# EAGLE board PCB_RoleaTheodorIoan_333CA (EAGLE 9.7.0)
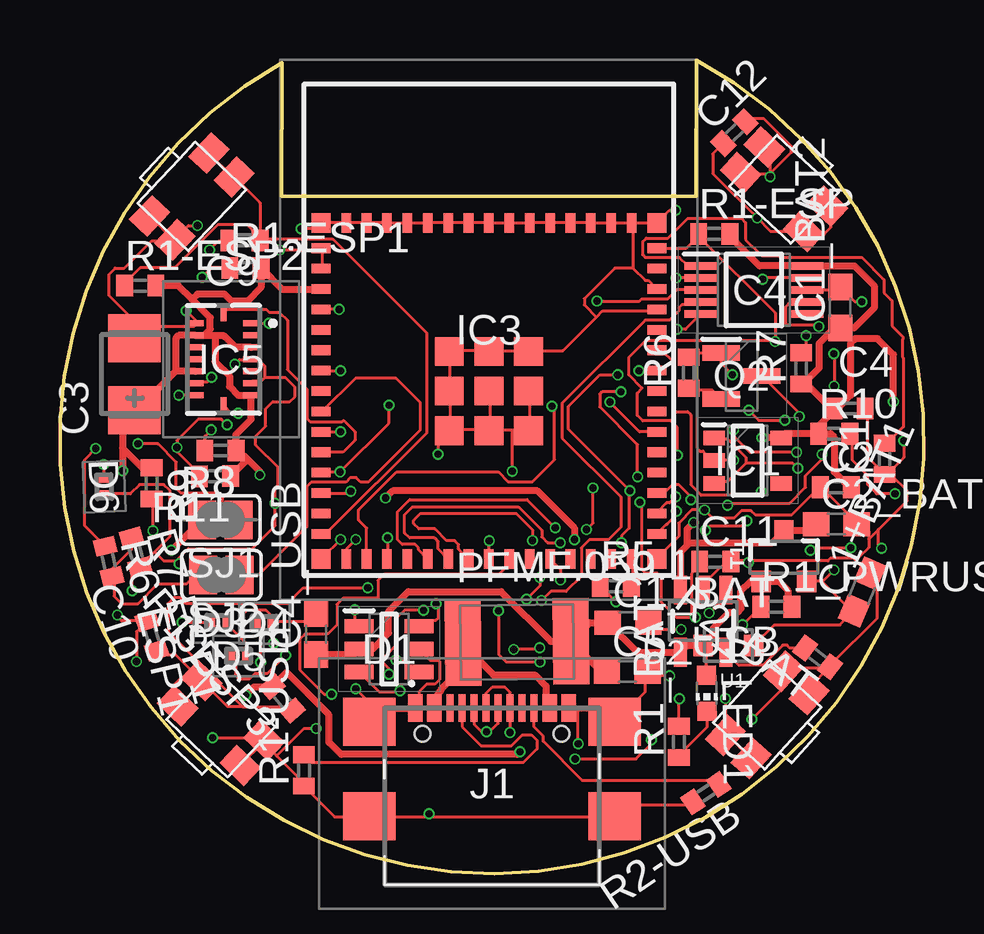
[diagram p0: board, top side]
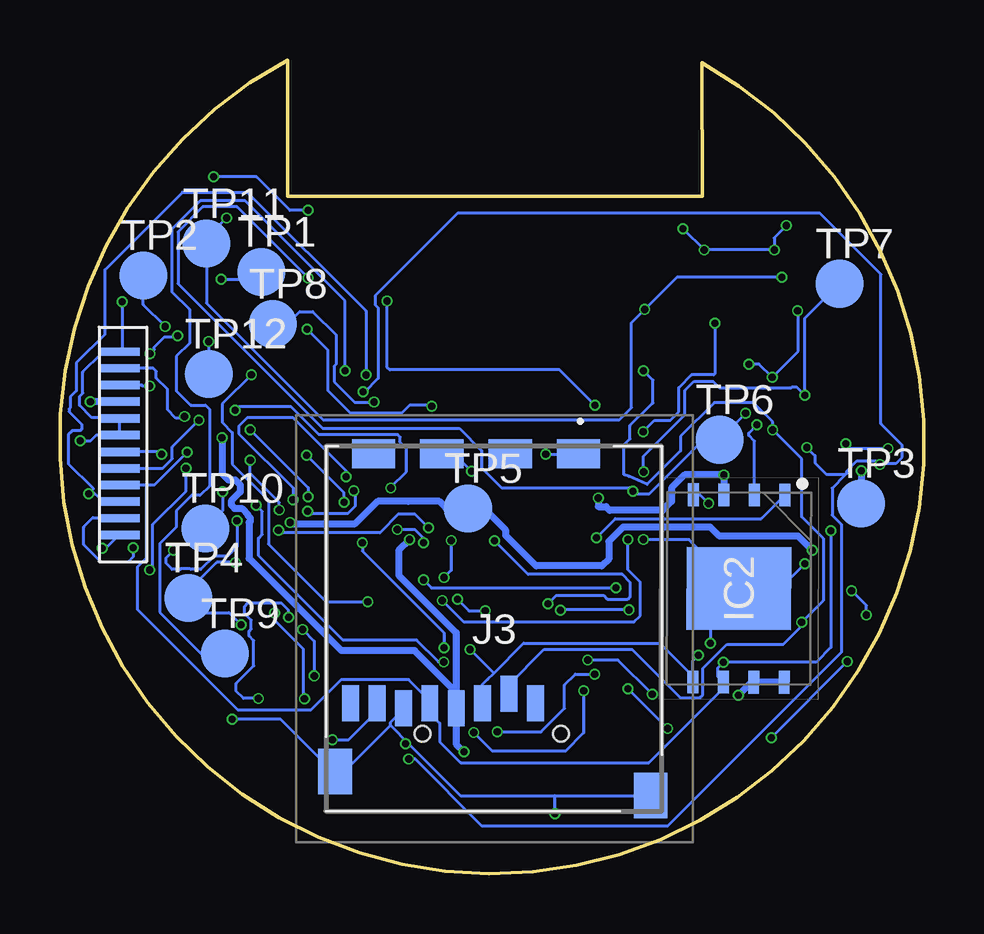
[diagram p1: board, bottom side, seen from below]

Size 36.01 x 33.9 mm. Coordinates in mm from the lower left corner, seen from the top.
Outline: 26.53,33.9 arc-303 9.26,33.79 9.24,28.22 26.51,28.22 26.53,33.9
Copper layers (1*16): Top / Bottom
Stack-up Default Layer Stack: Top User Defined 0.035mm / Dielectric-1 User Defined 1.6mm / Bottom User Defined 0.035mm
Design rules: minimum copper width 5mil, minimum drill size 0.3mm, copper clearance wire_polygon to wire_polygon 5mil, copper clearance wire_polygon to pad_smd 5mil, copper clearance wire_polygon to via 5mil, copper clearance pad_smd to pad_smd 5mil, copper clearance pad_smd to via 5mil, copper clearance via to via 5mil, copper clearance smd to pad (same net) 5mil, copper clearance smd to via (same net) 5mil, copper clearance smd to smd (same net) 5mil, dimension clearance 0.2mm, restrict clearance 0mil, via restrict clearance 0mil, drill distance 6mil, keepout clearance 0mil

## Footprints (pad centres in the part's own frame; a part is rotated, then mirrored left to right if it is on the bottom)
BUTTON = smd 1.4 x 1.05: P$1 -0.05,-0.725; P$2 -0.045,-2.175; P$3 3.55,-2.175; P$4 3.55,-0.725
EAGLE-LTSPICE_C0402 = smd 0.7 x 0.9: 1 -0.65,0; 2 0.65,0
RCL_C0603 = smd 1.1 x 1: 1 -0.85,0; 2 0.85,0
CT3528 = smd 2 x 2.2: + -1.5,0; - 1.5,0
SOT95P280X145-6N = smd 1.2 x 0.6: 1 -1.25,0.95; 2 -1.25,0; 3 -1.25,-0.95; 4 1.25,-0.95; 5 1.25,0; 6 1.25,0.95
AVX---SD0805S020S1R0_AVX_SD0805S020S1R0_0 = smd 0.8 x 0.9: 1 -1.05,0; 2 1.05,0
PESD5V0S1BL315 = smd 0.4 x 0.7: 1 -0.35,0; 2 0.35,0
SOT95P280X120-5N = smd 0.9 x 0.6: 1 -1.4,0.95; 2 -1.4,0; 3 -1.4,-0.95; 4 1.4,-0.95; 5 1.4,0.95
SON127P800X600X80-9N = smd 0.95 x 0.45: 1 -3.9,1.905; 2 -3.9,0.635; 3 -3.9,-0.635; 4 -3.9,-1.905; 5 3.9,-1.905; 6 3.9,-0.635; 7 3.9,0.635; 8 3.9,1.905 | smd 3.45 x 4.35: 9 0,0
ESP32S3MINI1N8 = smd 0.8 x 0.4: 1 -7,5.95; 2 -7,5.1; 3 -7,4.25; 4 -7,3.4; 5 -7,2.55; 6 -7,1.7; 7 -7,0.85; 8 -7,0; 9 -7,-0.85; 10 -7,-1.7; 11 -7,-2.55; 12 -7,-3.4; 13 -7,-4.25; 14 -7,-5.1; 15 -7,-5.95; 31 7,-5.95; 32 7,-5.1; 33 7,-4.25; 34 7,-3.4; 35 7,-2.55; 36 7,-1.7; 37 7,-0.85; 38 7,0; 39 7,0.85; 40 7,1.7; 41 7,2.55; 42 7,3.4; 43 7,4.25; 44 7,5.1; 45 7,5.95 | smd 0.4 x 0.8: 16 -5.95,-7; 17 -5.1,-7; 18 -4.25,-7; 19 -3.4,-7; 20 -2.55,-7; 21 -1.7,-7; 22 -0.85,-7; 23 0,-7; 24 0.85,-7; 25 1.7,-7; 26 2.55,-7; 27 3.4,-7; 28 4.25,-7; 29 5.1,-7; 30 5.95,-7; 46 5.95,7; 47 5.1,7; 48 4.25,7; 49 3.4,7; 50 2.55,7; 51 1.7,7; 52 0.85,7; 53 0,7; 54 -0.85,7; 55 -1.7,7; 56 -2.55,7; 57 -3.4,7; 58 -4.25,7; 59 -5.1,7; 60 -5.95,7 | smd 1.2 x 1.2: 61 0,0; 66 -1.65,1.65; 67 -1.65,0; 68 -1.65,-1.65; 69 0,-1.65; 70 1.65,-1.65; 71 1.65,0; 72 1.65,1.65; 73 0,1.65 | smd 0.8 x 0.8: 62 -7,7; 63 -7,-7; 64 7,-7; 65 7,7
SOP50P490X110-10N = smd 1.4 x 0.3: 1 -2.2,1; 2 -2.2,0.5; 3 -2.2,0; 4 -2.2,-0.5; 5 -2.2,-1; 6 2.2,-1; 7 2.2,-0.5; 8 2.2,0; 9 2.2,0.5; 10 2.2,1
BMI085 = smd 0.675 x 0.25: 1 1.165,1.5; 2 1.165,1; 3 1.165,0.5; 4 1.165,0; 5 1.165,-0.5; 6 1.165,-1; 7 1.165,-1.5; 9 -1.165,-1.5; 10 -1.165,-1; 11 -1.165,-0.5; 12 -1.165,0; 13 -1.165,0.5; 14 -1.165,1; 15 -1.165,1.5 | smd 0.25 x 0.675: 8 0,-1.915; 16 0,1.915
USB4110GFA = smd 0.3 x 1.15: A1 -3.35,3.678; A4 -2.55,3.678; A5 -1.25,3.678; A6 -0.25,3.678; A7 0.25,3.678; A8 1.25,3.678; A9 2.55,3.678; A12 3.35,3.678; B1 3.05,3.678; B4 2.25,3.678; B5 1.75,3.678; B6 0.75,3.678; B7 -0.75,3.678; B8 -1.75,3.678; B9 -2.25,3.678; B12 -3.05,3.678 | smd 2.18 x 2: MP1 -5.11,-0.827; MP2 5.11,-0.827; MP3 -5.11,3.103; MP4 5.11,3.103 | hole 0.65: -2.89,2.603; 2.89,2.603
112ATAARR03ATTEND = smd 1.8 x 1.2: G1 10.6,10.4; G2 4.9,10.4; S1 7.75,10.4; S2 2.05,10.4 | smd 1.4 x 1.9: G3 13.6,-3.85; G4 0.45,-2.85 | smd 0.7 x 1.5: P1 8.8,0; P2 7.7,0.4; P3 6.6,0; P4 5.5,-0.2; P5 4.4,0; P6 3.3,-0.2; P7 2.2,0; P8 1.1,0
ADAFRUIT_CHIP-LED0603 = smd 0.8 x 0.8: A 0,-0.75; C 0,0.75
VARISTOR_CT/CN1812 = smd 1.5 x 3.6: 1 -2.25,0; 2 2.25,0
SOT96P240X120-3N = smd 1.55 x 0.65: 1 -0.85,0.96; 2 -0.85,-0.96; 3 0.85,0
EAGLE-LTSPICE_R0402 = smd 0.7 x 0.9: 1 -0.65,0; 2 0.65,0
SJ = smd 1.168 x 1.6: 1 -0.762,0; 2 0.762,0
SPARKFUN-DISCRETESEMI_SOT23-3 = smd 0.8 x 0.9: 1 -0.95,-1; 2 0.95,-1; 3 0,1.1
TP20R = smd 2 x 2: TP 0,0
SPARKFUN-IC-POWER_SOT23-5 = smd 0.55 x 1.2: 1 -0.95,-1.3; 2 0,-1.3; 3 0.95,-1.3; 4 0.95,1.3; 5 -0.95,1.3
LCD_CONNECTOR = smd 0.35 x 1.7: 1 1.85,0.84; 2 2.54,0.84; 3 3.24,0.84; 4 3.93,0.84; 5 4.63,0.84; 6 5.32,0.84; 7 6.02,0.84; 8 6.71,0.84; 9 7.4,0.84; 10 8.09,0.84; 11 8.79,0.84; 12 9.48,0.84

## Placement (x,y rotation side)
BOOT_BUTTON  BUTTON  [BUTTON]  29.89,30.77 316.9 top
BUTTON1  BUTTON  [BUTTON]  3.24,27.94 46.7 top
BUTTON2  BUTTON  [BUTTON]  6.98,4.02 136.5 top
C1  1uF  [EAGLE-LTSPICE_C0402]  34.37,17.28 90 top
C1+BAT1  4.7uF  [RCL_C0603]  33.44,11.74 66.8 top
C1_BAT  4.7uF  [RCL_C0603]  23.68,10.46 0 top
C1_BAT2  4.7uF  [RCL_C0603]  32.53,23.59 90 top
C2  1uF  [EAGLE-LTSPICE_C0402]  32.34,16.1 0 top
C2_BAT  4.7uF  [RCL_C0603]  32.36,14.56 0 top
C3  100uF  [CT3528]  3.1,20.81 90 top
C4  100nF  [EAGLE-LTSPICE_C0402]  32.91,19.38 0 top
C4_USB  100nF  [RCL_C0603]  10.68,9.98 90 top
C5_USB  4.7nF  [RCL_C0603]  23.65,8.41 0 top
C9  100nF  [EAGLE-LTSPICE_C0402]  7.69,26.39 180 top
C10  100nF  [EAGLE-LTSPICE_C0402]  3.83,9.91 107.9 top
C11  1uF  [EAGLE-LTSPICE_C0402]  27.31,13 0 top
C12  100nF  [EAGLE-LTSPICE_C0402]  28.11,30.88 44.4 top
D1  USBLC6-2SC6Y  [SOT95P280X145-6N]  13.72,9.36 0 top
D2  AVX---SD0805S020S1R0_AVX_SD0805S020S1R0AVX_SD0805S020S1R0_0_0  [AVX---SD0805S020S1R0_AVX_SD0805S020S1R0_0]  27.86,9.51 180 top
D3  PESD3V3S1BLYL  [PESD5V0S1BL315]  6.62,10.47 0 top
D4  PESD3V3S1BLYL  [PESD5V0S1BL315]  8.51,10.43 0 top
D5  PESD3V3S1BLYL  [PESD5V0S1BL315]  7.44,9.07 0 top
D6  PESD3V3S1BLYL  [PESD5V0S1BL315]  1.84,16.13 272.2 top
IC1  XC6220A331MR-G  [SOT95P280X120-5N]  28.66,17.21 0 top
IC2  W25Q256JVEIQ  [SON127P800X600X80-9N]  7.71,11.88 269.8 bottom
IC3  ESP32-S3-MINI-1-N8  [ESP32S3MINI1N8]  17.88,20.11 0 top
IC4  DRV2605LDGST  [SOP50P490X110-10N]  28.92,24.32 0 top
IC5  BMI085  [BMI085]  6.81,21.43 0 top
J1  USB4110-GF-A  [USB4110GFA]  18.01,3.22 0 top
J3  112A-TAAR-R03_ATTEND  [112ATAARR03ATTEND]  24.99,7.1 0 bottom
LED1  [ADAFRUIT_CHIP-LED0603]  26.96,7.52 180.9 top
PFMF.050.1  500mA  [VARISTOR_CT/CN1812]  19.05,9.65 0.7 top
Q2  2N7002  [SOT96P240X120-3N]  28.41,20.74 0 top
R1-ESP  10K  [EAGLE-LTSPICE_R0402]  27.27,26.66 0 top
R1-ESP1  10K  [EAGLE-LTSPICE_R0402]  7.73,25.24 0 top
R1-ESP2  10K  [EAGLE-LTSPICE_R0402]  3.35,24.5 0 top
R1-ESP3  10K  [EAGLE-LTSPICE_R0402]  9.27,7.29 130.8 top
R1-USB  5K1  [EAGLE-LTSPICE_R0402]  10.17,4.3 90 top
R1_BAT  200  [EAGLE-LTSPICE_R0402]  25.8,5.49 90 top
R1_PWRUSB  100K  [EAGLE-LTSPICE_R0402]  29.86,11.12 0 top
R2-USB  5K1  [EAGLE-LTSPICE_R0402]  26.92,3.36 214.1 top
R2_BAT  2K  [EAGLE-LTSPICE_R0402]  31.58,9.01 143.2 top
R5  10K  [EAGLE-LTSPICE_R0402]  23.17,11.98 0 top
R6  10K  [EAGLE-LTSPICE_R0402]  26.21,20.87 90 top
R6-ESP1  100K  [EAGLE-LTSPICE_R0402]  2.03,13.01 283.3 top
R7  22  [EAGLE-LTSPICE_R0402]  30.89,21.05 90 top
R7-ESP1  100K  [EAGLE-LTSPICE_R0402]  3.15,13.39 285.8 top
R8  10K  [EAGLE-LTSPICE_R0402]  6.69,17.63 180 top
R9  10K  [EAGLE-LTSPICE_R0402]  3.82,16.26 270 top
R10  10K  [EAGLE-LTSPICE_R0402]  32.27,18.33 0 top
R11  10K  [EAGLE-LTSPICE_R0402]  6.46,16.56 180.3 top
RESSET_BUTTON  BUTTON  [BUTTON]  31.73,6.94 227.8 top
SJ1  [SJ]  6.68,14.74 180 top
SJ2  [SJ]  6.73,12.45 180 top
T1  20V/4.2A/52mΩ/1.4W  [SPARKFUN-DISCRETESEMI_SOT23-3]  30.18,13.18 0 top
TP1  TPTP20R  [TP20R]  27.62,25.06 0 bottom
TP2  TPTP20R  [TP20R]  32.54,24.93 0 bottom
TP3  TPTP20R  [TP20R]  2.61,15.43 0 bottom
TP4  TPTP20R  [TP20R]  30.65,11.49 0 bottom
TP5  TPTP20R  [TP20R]  19,15.22 0 bottom
TP6  TPTP20R  [TP20R]  8.52,18.08 0 bottom
TP7  TPTP20R  [TP20R]  3.52,24.58 0 bottom
TP8  TPTP20R  [TP20R]  27.14,22.9 0 bottom
TP9  TPTP20R  [TP20R]  29.14,9.17 0 bottom
TP10  TPTP20R  [TP20R]  29.96,14.39 0 bottom
TP11  TPTP20R  [TP20R]  29.9,26.25 0 bottom
TP12  TPTP20R  [TP20R]  29.81,20.82 0 bottom
U1  SPARKFUN-IC-POWER_MCP73831  [SPARKFUN-IC-POWER_SOT23-5]  26.81,10.52 180 top
U$1  LCD  [LCD_CONNECTOR]  34.38,23.6 270 bottom

## Library data of the parts
BOOT_BUTTON BUTTON1 BUTTON2 LED1 PFMF.050.1 RESSET_BUTTON SJ1 SJ2 TP1-TP12 U$1 = Hector_Watch
C1 C2 C4 C9-C12 = Hector_Watch; SPICEMODEL: NONE; SPICEPREFIX: C
C1+BAT1 C1_BAT C1_BAT2 C2_BAT C3 C4_USB C5_USB = Hector_Watch; SPICEPREFIX: C
D1 = Hector_Watch; ARROW_PART_NUMBER: USBLC6-2SC6Y; ARROW_PRICE-STOCK: https://www.arrow.com/en/products/usblc6-2sc6y/stmicroelectronics?region=nac; DESCRIPTION: Low Cap. ESD Protection Auto SOT-23-6 STMicroelectronics USBLC6-2SC6Y, Dual Uni-Directional TVS Diode Array, 6-Pin SOT-23; HEIGHT: 1.45mm; MANUFACTURER_NAME: STMicroelectronics; MANUFACTURER_PART_NUMBER: USBLC6-2SC6Y; MOUSER_PART_NUMBER: 511-USBLC6-2SC6Y; MOUSER_PRICE-STOCK: https://www.mouser.co.uk/ProductDetail/STMicroelectronics/USBLC6-2SC6Y?qs=gNDSiZmRJS%2FOgDexvXkdow%3D%3D
D2 = Hector_Watch; CENTROID_NOT_SPECIFIED: No; DATASHEET: http://datasheets.avx.com/schottky.pdf; DIGIKEY_DESCRIPTION: DIODE SCHOTTKY 20V 1A 0805; DIGIKEY_PART_NUMBER: 478-7800-1-ND; LEAD_FREE: yes; MF: AVX; MOUSER_PART_NUMBER: 581-SD0805S020S1R0; MPN: SD0805S020S1R0; PACKAGE: 0805 (2012 metric); PREFIX: D; ROHS: yes; TEMPERATURE_RANGE_HIGH: +125°C; TEMPERATURE_RANGE_LOW: -55°C
D3-D6 = Hector_Watch; ARROW_PART_NUMBER: PESD3V3S1BLYL; ARROW_PRICE-STOCK: https://www.arrow.com/en/products/pesd3v3s1blyl/nexperia?region=nac; DESCRIPTION: PESD3V3S1BL - Low capacitance bidirectional ESD protection diode; HEIGHT: 0mm; MANUFACTURER_NAME: Nexperia; MANUFACTURER_PART_NUMBER: PESD3V3S1BLYL; MOUSER_PART_NUMBER: 771-PESD3V3S1BLYL; MOUSER_PRICE-STOCK: https://www.mouser.co.uk/ProductDetail/Nexperia/PESD3V3S1BLYL?qs=vLWxofP3U2zWoKHYJMVoKQ%3D%3D
IC1 = Hector_Watch; DESCRIPTION: LDO Voltage Regulators; HEIGHT: 1.2mm; MANUFACTURER_NAME: Torex; MANUFACTURER_PART_NUMBER: XC6220A331MR-G; MOUSER_PART_NUMBER: 865-XC6220A331MR-G; MOUSER_PRICE-STOCK: https://www.mouser.co.uk/ProductDetail/Torex-Semiconductor/XC6220A331MR-G?qs=AsjdqWjXhJ8ZSWznL1J0gg%3D%3D
IC2 = Hector_Watch; ARROW_PART_NUMBER: W25Q256JVEIQ; ARROW_PRICE-STOCK: https://www.arrow.com/en/products/w25q256jveiq/winbond-electronics?region=nac; DESCRIPTION: 256M-bit Serial Flash Memory with uniform 4KB sectors and Dual/Quad SPI; HEIGHT: 0.8mm; MANUFACTURER_NAME: Winbond; MANUFACTURER_PART_NUMBER: W25Q256JVEIQ; MOUSER_PART_NUMBER: 454-W25Q256JVEIQ; MOUSER_PRICE-STOCK: https://www.mouser.co.uk/ProductDetail/Winbond/W25Q256JVEIQ?qs=qSfuJ%252Bfl%2Fd4o%2FNFUf7yCgA%3D%3D
IC3 = Hector_Watch; DESCRIPTION: WiFi Development Tools - 802.11 [Engineering Samples] SMD Module, ESP32-S3FN8, 8 MB SPI Flash, PCB Antenna; HEIGHT: 2.55mm; MANUFACTURER_NAME: Espressif Systems; MANUFACTURER_PART_NUMBER: ESP32-S3-MINI-1-N8; MOUSER_PART_NUMBER: 356-ESP32-S3-MINI1N8; MOUSER_PRICE-STOCK: https://www.mouser.co.uk/ProductDetail/Espressif-Systems/ESP32-S3-MINI-1-N8?qs=XAiT9M5g4x82rl6F%2FIYUQg%3D%3D
IC4 = Hector_Watch; ARROW_PART_NUMBER: DRV2605LDGST; ARROW_PRICE-STOCK: https://www.arrow.com/en/products/drv2605ldgst/texas-instruments?region=nac; DESCRIPTION: ERM & LRA Device Haptic Driver 2-5V BGA9 Texas Instruments DRV2605LDGST Piezo Haptic Motor Driver IC, 5 V, 10-Pin VSSOP; HEIGHT: 1.1mm; MANUFACTURER_NAME: Texas Instruments; MANUFACTURER_PART_NUMBER: DRV2605LDGST; MOUSER_PART_NUMBER: 595-DRV2605LDGST; MOUSER_PRICE-STOCK: https://www.mouser.co.uk/ProductDetail/Texas-Instruments/DRV2605LDGST?qs=asCBFxFfL1TjvcNdZsR2BA%3D%3D
IC5 = Hector_Watch; ARROW_PART_NUMBER: BMI085; ARROW_PRICE-STOCK: https://www.arrow.com/en/products/bmi085/bosch; DESCRIPTION: IMUs - Inertial Measurement Units High-performance IMU BMI085 for virtual and augmented reality applications; HEIGHT: 1mm; MANUFACTURER_NAME: BOSCH; MANUFACTURER_PART_NUMBER: BMI085; MOUSER_PART_NUMBER: 262-BMI085; MOUSER_PRICE-STOCK: https://www.mouser.co.uk/ProductDetail/Bosch-Sensortec/BMI085?qs=y6ZabgHbY%252ByGCM8LfWZyqA%3D%3D
J1 = Hector_Watch; DESCRIPTION: CONN USB 2.0 TYPE-C R/A SMT; HEIGHT: 3.26mm; MANUFACTURER_NAME: GCT (GLOBAL CONNECTOR TECHNOLOGY); MANUFACTURER_PART_NUMBER: USB4110-GF-A; MOUSER_PART_NUMBER: 640-USB4110-GF-A; MOUSER_PRICE-STOCK: https://www.mouser.co.uk/ProductDetail/GCT/USB4110-GF-A?qs=KUoIvG%2F9IlYiZvIXQjyJeA%3D%3D
J3 = Hector_Watch; DESCRIPTION: Micro SD Card Socket, Push-Push Type, Top Mount, SMT, H=1.83mm, 10u; HEIGHT: 1.9mm; MANUFACTURER_NAME: ATTEND; MANUFACTURER_PART_NUMBER: 112A-TAAR-R03 ATTEND
Q2 = Hector_Watch; ARROW_PART_NUMBER: 2N7002; ARROW_PRICE-STOCK: https://www.arrow.com/en/products/2n7002/on-semiconductor?region=europe; DESCRIPTION: N-channel MOSFET,2N7002 0.115A 60V; HEIGHT: 1.2mm; MANUFACTURER_NAME: onsemi; MANUFACTURER_PART_NUMBER: 2N7002; MOUSER_PART_NUMBER: 512-2N7002; MOUSER_PRICE-STOCK: https://www.mouser.co.uk/ProductDetail/onsemi-Fairchild/2N7002?qs=0dwsXDNhqlz66WJJhrTFjQ%3D%3D
R1-ESP R1-ESP1-R1-ESP3 R1-USB R1_BAT R1_PWRUSB R2-USB R2_BAT R5 R6 R6-ESP1 R7 R7-ESP1 R8-R11 = Hector_Watch; SPICEMODEL: NONE; SPICEPREFIX: R
T1 = Hector_Watch; PROD_ID: TRANS-14715
U1 = Hector_Watch; PROD_ID: IC-09995

## Nets
3V3: C1_BAT2.1 C2.2 C3.+ C4.1 IC1.5 IC2.3 IC2.7 IC2.8 IC3.3 IC4.10 IC5.3 IC5.7 IC5.11 IC5.14 J3.P4 R1-ESP1.2 R1-ESP2.2 R1-ESP3.2 R1-ESP.2 R7.1 R8.1 R9.1 R10.1 R11.1 TP3.TP U$1.4
ADC_BAT: IC3.9 SJ2.1
BOOT: BOOT_BUTTON.P$3 BOOT_BUTTON.P$4 C12.1 IC3.4 R1-ESP1.1 TP11.TP
BUTTON1: BUTTON1.P$3 BUTTON1.P$4 C9.1 IC3.15 R1-ESP2.1
BUTTON2: BUTTON2.P$3 BUTTON2.P$4 C10.1 IC3.26 R1-ESP3.1
D+: D1.4 IC3.24
D-: D1.6 IC3.23
DISP_RST: IC3.20 U$1.11
DN: D1.1 J1.A7 J1.B7
DP: D1.3 J1.A6 J1.B6
EN_DRV: IC3.17 IC4.5
GND: BOOT_BUTTON.P$1 BOOT_BUTTON.P$2 BUTTON1.P$1 BUTTON1.P$2 BUTTON2.P$1 BUTTON2.P$2 C1+BAT1.2 C1.1 C1_BAT2.2 C1_BAT.2 C2.1 C2_BAT.2 C3.- C4.2 C4_USB.2 C5_USB.2 C9.2 C10.2 C11.2 C12.2 D1.5 D3.2 D4.2 D5.2 D6.2 IC1.2 IC2.4 IC2.9 IC3.1 IC3.2 IC3.42 IC3.43 IC3.46 IC3.47 IC3.48 IC3.49 IC3.50 IC3.51 IC3.52 IC3.53 IC3.54 IC3.55 IC3.56 IC3.57 IC3.58 IC3.59 IC3.60 IC3.61 IC3.62 IC3.63 IC3.64 IC3.65 IC3.66 IC3.67 IC3.68 IC3.69 IC3.70 IC3.71 IC3.72 IC3.73 IC4.8 IC5.4 IC5.6 IC5.10 IC5.15 J1.A1 J1.A12 J1.B1 J1.B12 J1.MP1 J1.MP2 J1.MP3 J1.MP4 J3.G1 J3.G2 J3.G3 J3.G4 J3.P6 Q2.2 R1-USB.1 R1_PWRUSB.1 R2-USB.2 R2_BAT.1 R6.1 R7-ESP1.2 RESSET_BUTTON.P$1 RESSET_BUTTON.P$2 TP4.TP U1.2 U$1.1 U$1.5 U$1.6 U$1.12
IMU_INT1: IC3.11 IC5.16
IMU_INT2: IC3.10 IC5.1
IN_DRV: IC3.16 IC4.4
LEDA: R7.2 U$1.3
LEDK: Q2.3 U$1.2
MISO: D6.1 IC2.2 IC3.33 J3.P7 R11.2
MOSI: D5.1 IC2.5 IC3.31 J3.P3 R10.2 U$1.10
N$1: J1.B5 R2-USB.1
N$2: R6-ESP1.1 SJ1.1
N$3: C1+BAT1.1 D2.1 IC1.1 IC1.3 T1.2
N$4: C1.2 IC4.1
N$7: Q2.1 R5.1 R6.2
N$8: R6-ESP1.2 R7-ESP1.1 SJ2.2
N$10: R1_BAT.2 U1.1
N$12: R2_BAT.2 U1.5
N$13: J1.A5 R1-USB.2
N$16: LED1.C R1_BAT.1
PIN_LED: IC3.30 R5.2
PPG_INT: IC3.36 TP8.TP
RESET: C11.1 IC3.45 R1-ESP.1 RESSET_BUTTON.P$3 RESSET_BUTTON.P$4 TP12.TP
RX: IC3.40 TP10.TP
SCK: D4.1 IC2.6 IC3.32 J3.P5 R9.2 U$1.9
SCL: IC3.13 IC4.2 IC5.8 TP6.TP
SDA: IC3.12 IC4.3 IC5.9 TP7.TP
SS_FLASH: IC2.1 IC3.18
SS_SD: D3.1 IC3.7 J3.P2 R8.2
SS_TFT: IC3.21 U$1.8
TFT_DC: IC3.22 U$1.7
TX: IC3.39 TP9.TP
VBAT: C2_BAT.1 SJ1.2 T1.3 TP5.TP U1.3
VBUS: C1_BAT.1 C4_USB.1 C5_USB.1 D1.2 D2.2 LED1.A PFMF.050.1.2 R1_PWRUSB.2 T1.1 U1.4
VIBE_OUT+: IC4.9 TP1.TP
VIBE_OUT-: IC4.7 TP2.TP
VUSB: J1.A4 J1.A9 J1.B4 J1.B9 PFMF.050.1.1

## Tracks (layer width: path | path; a pad name or v marks a point on that pad's centre or on a via)
3V3  (via drill 0.3)
  Top 0.3: v19.17,5.08 19.06,4.97 11.72,4.97 11.22,5.47 11.22,6.61 9.45,8.38 R1-ESP3.2 8.08,7.78 v7.73,7.43 | IC5.14 6,22.43 6.26,22.69 6.26,23.17 5.51,23.92 | 5.51,23.92 4.93,24.5 R1-ESP2.2 | IC5.14 4.96,22.43 4.82,22.3 4.82,20.93 | IC5.11 4.82,20.93 | 4.82,20.93 3.2,19.31 C3.+ 2.61,18.82 2.61,17.73 | R10.1 32.12,18.33 32.27,18.18 32.27,16.74 32.91,16.1 C2.2 | v29.26,18.16 IC1.5 30.23,18.33 R10.1 | C4.1 32.15,19.38 31.13,20.4 R7.1 30.97,20.4 31.64,21.06 31.64,22.09 32.29,22.74 C1_BAT2.1 33.11,22.74 33.94,23.57 33.94,24.5 33.12,25.32 IC4.10 29.16,25.32 27.92,26.56 R1-ESP.2 | v34.75,19.67 34.75,21.63 34.08,22.3 33.15,22.3 32.95,22.1 32.95,19.93 32.4,19.38 C4.1 | 2.61,17.73 v2.61,16.78 | IC5.3 7.31,21.93 6.87,22.37 6.81,22.43 6.4,22.43 | v8.33,16.61 8.33,16.75 7.83,17.25 | 7.83,17.25 7.45,17.63 R8.1 7.34,18.3 7.98,18.94 IC5.7 7.43,19.93 7.06,20.3 7.06,20.74 6.46,21.34 6.46,22.37 6.4,22.43 | IC5.14 6.4,22.43 | C4.1 32.26,19.28 31.62,18.64 R10.1 | 2.61,17.73 3.43,16.91 R9.1 | IC3.3 9.26,24.36 R1-ESP1.2 8.38,24.43 7.81,23.86 7.15,23.86 6.86,24.15 5.73,24.15 5.51,23.92 | R11.1 7.8,17.25 7.83,17.25 | v21.44,13.92 21.44,14.41 19.9,15.95 13.87,15.95 v13.57,15.65
  Bottom 0.3: v19.17,5.08 19.49,5.4 J3.P4 19.49,7.56 | v2.61,16.78 TP3.TP | v29.26,18.16 29.26,16.67 29,16.41 28.71,16.41 28.5,16.2 28.5,15.9 28.88,15.53 28.88,15.37 28.73,15.22 28.43,15.22 28.17,14.96 28.17,14.92 28.08,14.83 28.08,14.68 28.13,14.63 28.13,13.14 24.28,9.29 21.22,9.29 19.49,7.56 | U$1.4 v34.75,19.67 | IC2.8 IC2.7 7.18,7.98 v7.73,7.43 | 19.49,7.56 19.49,10.04 21.89,12.44 21.89,13.47 v21.44,13.92 | IC2.3 v8.33,16.61 9.98,16.61 10.52,16.07 10.52,15.51 10.89,15.14 13.1,15.14 13.25,15.29 13.57,15.29 v13.57,15.65
ADC_BAT
  Top 0.127: IC3.9 10.93,19.26 12.31,20.64 14.01,20.64 15,19.65 15,18.47 12.85,16.32 12.54,16.32 12.35,16.5 12.1,16.5 11.92,16.32 10.47,16.32 10.28,16.13 10.28,14.45 8.28,12.45 SJ2.1
BOOT  (via drill 0.3)
  Top 0.127: v11.64,23.51 IC3.4 | R1-ESP1.1 6.31,25.24 v5.92,24.85 | BOOT_BUTTON.P$3 31.09,26.66 31.87,26.66 32.14,26.93 32.14,27.66 BOOT_BUTTON.P$4 | BOOT_BUTTON.P$3 | BOOT_BUTTON.P$4 | C12.1 27.22,29.99 27.22,29.16 v29.06,27.32 29.63,26.76 BOOT_BUTTON.P$3
  Bottom 0.127: v5.92,24.85 10.3,24.85 v11.64,23.51 12.18,22.96 12.18,19.42 12.68,18.92 25.05,18.92 29.9,23.77 TP11.TP 29.9,26.48 v29.06,27.32
BUTTON1
  Top 0.127: BUTTON1.P$4 7.2,29.03 BUTTON1.P$3 8.34,27.95 C9.1 | BUTTON1.P$4 | C9.1 8.34,26.49 7.8,27.03 6.56,27.03 4.78,25.25 3.35,25.25 2.7,24.6 R1-ESP2.1 | C9.1 8.4,26.45 11.36,26.45 15.27,22.54 15.27,18.35 11.08,14.16 IC3.15
BUTTON2  (via drill 0.3)
  Top 0.127: BUTTON2.P$3 4.85,9.1 4.23,9.1 C10.1 | 7.61,6.96 6.99,6.96 BUTTON2.P$3 | R1-ESP3.1 9.54,6.96 7.61,6.96 | 7.61,6.96 4.5,10.07 4.5,11.25 4.74,11.49 5.01,11.49 5.25,11.25 9.49,11.25 10.14,11.91 v12.83,11.91 | BUTTON2.P$3 5.8,8.14 5.04,8.14 4.76,7.87 4.76,7.14 BUTTON2.P$4 | BUTTON2.P$4 | IC3.26 20.86,12.68 v20.86,12.24
  Bottom 0.127: v20.86,12.24 20.53,11.91 v12.83,11.91
D+  (via drill 0.3)
  Top 0.127: IC3.24 18.73,12.91 18.3,12.48 13.51,12.48 13.25,12.22 13.25,11.47 11.8,11.47 11.54,11.22 11.54,10.37 11.15,9.98 10.21,9.98 9.99,9.76 9.99,8.5 11.01,7.48 v11.32,7.48 | D1.4 14.75,8.41 14.25,8.9 v14.01,8.9
  Bottom 0.127: v11.32,7.48 12.74,8.9 v14.01,8.9
D-  (via drill 0.3)
  Top 0.127: D1.6 15.21,10.55 15.67,10.55 15.77,10.65 15.77,11.15 v15.67,11.25 | IC3.23 v17.88,13.86 v17.89,13.87
  Bottom 0.127: v15.67,11.25 15.32,11.6 13.34,11.6 13.18,11.44 12.34,11.44 12.23,11.55 12.23,12.13 12.57,12.47 16.49,12.47 v17.89,13.87
DISP_RST  (via drill 0.3)
  Top 0.127: v20.64,14.41 19.47,15.58 14.57,15.58 14.07,15.08 14.07,13.91 14.26,13.72 14.79,13.72 14.94,13.57 14.94,13.5 IC3.20 | v28.64,14.71 28.41,14.48 27.07,14.48 v26.91,14.31 | v31.28,13.47 31.39,13.58 v32.96,13.58
  Bottom 0.127: U$1.11 33.52,14.83 34.64,14.83 35.02,14.45 35.02,13.71 34.31,13.01 33.15,13.01 32.96,13.19 v32.96,13.58 | v20.64,14.41 21.22,14.99 21.89,14.99 22.68,14.2 26.8,14.2 v26.91,14.31 | v28.64,14.71 28.64,13.62 29.03,13.23 29.59,13.23 30.15,12.68 30.56,12.68 30.59,12.71 30.97,12.71 31,12.68 31.34,12.68 31.6,12.94 31.6,13.16 v31.28,13.47
DN  (via drill 0.3)
  Top 0.127: J1.B7 17.26,6.22 17.57,5.91 v17.78,5.91 17.91,5.91 18.26,6.26 J1.A7 | D1.1 12.29,10.48 v12.29,10.99 | v13.72,8.31 13.72,8.53 13.46,8.79 13.46,8.97 14.06,9.57 14.06,10.67 14.37,10.98 v15.15,10.98
  Bottom 0.127: v17.78,5.91 15.95,5.91 14.97,6.89 14.97,7.87 14.53,8.31 v13.72,8.31 | v12.29,10.99 v15.14,10.99 v15.15,10.98
DP  (via drill 0.3)
  Top 0.127: D1.3 13.31,7.57 14.12,7.57 v14.18,7.63 | v18.76,5.88 J1.B6 18.76,7.55 18.55,7.76 18.01,7.76 17.76,7.51 J1.A6
  Bottom 0.127: v14.18,7.63 14.18,5.86 14.92,5.12 18,5.12 v18.76,5.88
EN_DRV  (via drill 0.3)
  Top 0.127: IC3.17 12.78,14.4 12.45,14.73 12.45,15.16 14.03,16.74 18.27,16.74 18.68,16.33 19.7,16.33 20.62,17.25 20.62,19.36 v20.51,19.47 | IC4.5 26.08,22.68 v25.71,22.68
  Bottom 0.127: v25.71,22.68 24.85,21.82 24.85,20.14 23.92,19.21 21.74,19.21 21.42,19.53 20.57,19.53 v20.51,19.47
GND  (via drill 0.3)
  Top 0.127: v28.46,10.37 29.1,11 R1_PWRUSB.1 | 26.56,20.15 27.19,20.15 27.44,19.89 Q2.2 | 26.56,20.15 26.3,20.15 R6.1 26.56,20.15 | 26.56,20.15 26.56,17.73 26.68,17.61 26.81,17.61 27.19,17.22 IC1.2 27.32,17.22 v28.08,17.22 | C4.2 33.67,19.26 33.67,17.35 34.3,16.72 C1.1 34.43,16.59 | R2_BAT.1 32.02,8.59 30.37,8.59 30.24,8.46 RESSET_BUTTON.P$2 30.11,8.33 30.11,7.7 v28.84,6.43 | IC3.64 24.9,13.16 25.79,14.05 25.79,14.61 26.34,15.15 v26.87,15.15 27.21,14.81 28.1,14.81 28.41,15.13 28.81,15.13 29,14.94 30.49,14.94 31.64,16.08 C2.1 31.76,16.08 33.16,14.68 C2_BAT.2 33.42,14.56 33.71,14.27 33.71,13.94 | 28.7,13.03 32.02,13.03 32.14,13.16 33.06,13.16 33.07,13.15 | 28.7,13.03 28.08,13.03 C11.2 27.78,13 26.81,12.08 U1.2 | 33.07,13.15 33.27,13.15 33.71,13.59 33.71,13.94 | R2_BAT.1 32.14,8.72 34.05,10.62 34.05,12.14 33.79,12.4 C1+BAT1.2 33.7,12.52 33.07,13.15 | 34.43,16.59 34.68,16.59 35.32,15.95 35.32,15.54 34.11,14.34 | 34.11,14.34 33.71,13.94 | 28.7,13.03 v28.7,12.97 | 21.68,6.81 22.49,6.81 22.92,6.38 J1.MP4 23.15,6.33 24.4,7.57 24.4,8.33 C5_USB.2 24.67,8.24 v25.41,8.24 | 21.68,6.81 21.6,6.81 v21.6,5.41 | 21.68,6.81 J1.A12 J1.B1 | R2-USB.2 26.3,2.87 23.63,2.87 23.16,2.4 J1.MP2 22.99,2.37 15.38,2.37 | 13.35,6.68 13.1,6.44 J1.MP3 13.32,6.71 | 13.35,6.68 13.47,6.81 14.53,6.81 J1.A1 14.67,6.89 14.87,6.81 14.74,6.81 14.94,6.88 J1.B12 14.96,7.58 15.28,7.9 15.63,7.9 15.82,8.09 15.82,8.84 15.76,8.9 15.43,8.9 D1.5 | 9.03,4.91 8.39,5.54 BUTTON2.P$2 | 9.03,4.91 10.17,3.76 R1-USB.1 10.17,3.64 11.44,2.37 12.84,2.37 J1.MP1 12.97,2.37 15.38,2.37 | v12.33,7.7 13.32,6.71 | 13.32,6.71 13.35,6.68
  Top 0.127: v10.68,6.05 10.17,6.05 9.03,4.91 | 15.38,2.37 v15.38,2.49 | D4.2 8.9,10.49 10.43,10.49 10.68,10.75 C4_USB.2 | v11.7,13.92 10.93,13.16 IC3.63 | v8.9,9.6 8.9,10.37 D4.2 | 8.52,20.65 8.39,20.53 8.01,20.53 IC5.6 | 8.52,20.65 8.52,21.16 8.27,21.42 8.01,21.42 | 8.01,21.42 IC5.4 | 3.95,13.41 3.31,12.78 R7-ESP1.2 3.01,12.45 v3.01,11.79 | 3.95,13.41 4.58,14.05 4.58,15.95 4.33,16.21 3.31,16.21 2.93,15.83 1.92,15.83 D6.2 | 8.52,20.65 9.41,20.65 9.79,20.27 9.79,19.88 9.58,19.67 8.87,19.67 8.58,19.38 8.58,18.65 8.16,18.23 8.16,17.86 9.09,16.93 9.09,16.2 8.97,16.08 v8.97,15.43 8.97,14.5 8.01,13.54 5.35,13.54 4.84,13.03 | 4.84,13.03 4.33,13.03 3.95,13.41 | 4.84,13.03 v4.97,12.91 | IC3.2 10.93,25.23 10.93,25.99 IC3.1 10.81,25.99 v9.16,25.99 | v6.24,25.99 6.62,26.37 7,26.37 C9.2 | v5.73,27 5.35,27 4.84,26.5 BUTTON1.P$2 | 3.44,22.69 3.19,22.43 C3.- 3.44,22.69 | 3.44,22.69 3.57,22.81 5.6,22.81 IC5.15 5.65,23.06 v5.26,23.45 | C10.2 3.57,10.62 3.19,10.62 C10.2 | 3.44,22.69 2.04,24.08 2.04,24.97 2.3,25.23 2.68,25.23 3.82,26.37 4.71,26.37 BUTTON1.P$2 | 22.36,23.19 20.97,21.8 19.57,21.8 IC3.72 19.44,21.8 17.92,21.8 IC3.73 17.79,21.8 16.27,21.8 IC3.66 16.27,21.67 16.27,20.15 IC3.67 16.27,20.02 16.27,18.49 | 22.36,23.19 22.62,23.45 24.78,23.45 IC3.42 | IC3.70 19.57,18.49 19.57,20.02 IC3.71 | 17.92,18.49 17.92,20.02 IC3.61 | 16.27,18.49 17.79,18.49 IC3.69 17.92,18.49 | 16.27,18.49 IC3.68 16.14,18.37 15.76,17.99 v15.76,17.48 | 17.92,18.49 18.85,18.49 | 18.85,18.49 19.06,18.49 | 19.06,18.49 19.44,18.49 IC3.70 | 29.6,29.16 30.49,30.05 30.49,30.31 29.35,31.45 28.59,31.45 C12.2 | 29.6,29.16 28.46,29.16 BOOT_BUTTON.P$2
  Top 0.127: IC3.46 23.76,27.13 23,27.13 IC3.47 22.87,27.13 22.24,27.13 IC3.48 22.11,27.13 21.35,27.13 IC3.49 21.22,27.13 20.46,27.13 IC3.50 20.33,27.13 19.7,27.13 IC3.51 19.57,27.13 18.81,27.13 IC3.52 18.68,27.13 17.92,27.13 IC3.53 17.79,27.13 17.16,27.13 IC3.54 17.03,27.13 16.27,27.13 IC3.55 16.14,27.13 15.38,27.13 IC3.56 15.25,27.13 14.49,27.13 IC3.57 14.36,27.13 13.73,27.13 IC3.58 13.6,27.13 12.84,27.13 IC3.59 12.71,27.13 11.95,27.13 IC3.60 11.82,27.13 10.93,27.13 IC3.62 10.81,27 10.68,26.88 v10.05,26.88 | 23.89,25.23 24.4,24.72 24.52,24.72 24.78,24.46 IC3.43 | 23.89,25.23 23.89,27 IC3.46 | IC3.46 23.89,27.13 24.78,27.13 IC3.65 24.9,27.13 25.41,27.64 v25.67,27.64 | 22.36,23.19 21.86,23.7 21.86,23.96 23.13,25.23 23.89,25.23 | 18.85,18.49 v18.85,16.77 | 19.06,18.49 IC3.70 | v6.36,5.67 8.39,5.67 BUTTON2.P$2 | IC4.8 31.13,24.34 32.53,24.34 C1_BAT2.2 33.14,23.83 v33.42,23.83 | 7.53,9.84 7,10.37 D3.2 | 7.53,9.84 7.76,9.6 7.76,9.1 D5.2 | C10.2 2.56,10.53 2.39,10.7 v2.39,10.78 | C10.2 3.19,10.08 v3.19,8.84 | 7.53,9.84 7.53,10.69 7.83,10.99 8.58,10.99 8.86,10.71 D4.2 | C1_BAT.2 24.82,10.17 v25.89,10.17 | IC5.10 5.72,20.5 6.16,20.5 6.32,20.66 v6.32,20.68 | v7.29,21.23 7.48,21.42 8.01,21.42 | v35.17,18.04 35.17,17.33 34.43,16.59 | 29.6,29.16 v29.6,29.04 29.6,30.03 BOOT_BUTTON.P$1 | BUTTON2.P$2 8.51,5.51 BUTTON2.P$1 | BUTTON1.P$1 4.73,26.42 BUTTON1.P$2 | R2_BAT.1 31.23,7.75 RESSET_BUTTON.P$1 | v34.25,13.56 34.11,13.7 34.11,14.34
  Bottom 0.127: v28.46,10.37 28.97,10.87 30.63,10.87 31.1,11.34 30.82,11.62 | v28.08,17.22 28.08,16.68 26.87,15.47 v26.87,15.15 | 30.82,11.62 29.47,12.97 v28.7,12.97 | 22.24,6.18 22.24,6.3 21.75,6.79 J3.P6 | 22.24,6.18 24.14,4.27 24.53,4.27 J3.G4 24.68,4.3 26.81,6.43 v28.84,6.43 | 15.38,3.25 19.32,3.25 21.48,5.41 | 15.38,3.25 J3.G3 | 22.24,6.18 21.48,5.41 | 21.48,5.41 v21.6,5.41 | v10.68,6.05 v12.33,7.7 | v15.38,2.49 15.38,3.25 | v18.85,16.77 19.54,17.46 J3.G2 | v11.7,13.92 9.79,13.92 7.76,11.89 IC2.9 | v8.9,9.6 8.9,10.62 7.76,11.76 IC2.9 | v4.97,12.91 5.98,11.89 7.63,11.89 IC2.9 | IC2.4 9.33,15.79 v8.97,15.43 | v5.73,27 6.24,26.5 v6.24,25.99 v9.16,25.99 v10.05,26.88 | v15.76,17.48 14.49,17.48 14.47,17.5 J3.G1 | v29.6,29.04 27.83,29.04 26.43,27.64 v25.67,27.64 | v3.19,8.84 v6.36,5.67 | 30.82,11.62 TP4.TP | v2.39,10.78 2.39,11.18 v3,11.79 v3.01,11.79 | v33.42,23.83 33.42,21.87 U$1.1 33.67,21.67 34.3,21.67 35.06,20.91 35.06,20.02 35.19,19.89 35.19,19.51 34.68,19 33.67,19 U$1.5 33.54,18.88 33.54,18.37 U$1.6 34.49,18.28 34.73,18.04 v35.17,18.04 | v25.89,10.17 25.41,9.69 v25.41,8.24 | v7.29,21.23 6.87,21.23 v6.32,20.68 5.23,21.77 5.23,23.42 v5.26,23.45 | U$1.12 34.1,13.56 v34.25,13.56
IMU_INT1
  Top 0.127: IC5.16 6.98,23.51 8.6,23.51 8.72,23.39 9.14,23.39 9.48,23.05 9.48,21 10.29,20.19 10.29,18.96 10.42,18.83 11.75,18.83 11.81,18.89 12.3,18.4 12.3,18.06 11.79,17.56 IC3.11
IMU_INT2  (via drill 0.3)
  Top 0.127: IC3.10 v11.7,18.41 | IC5.1 v8.71,22.93
  Bottom 0.127: v11.7,18.41 11.22,18.89 10.57,18.89 10.21,19.25 10.21,20.25 9.68,20.78 8.77,20.78 8.71,20.84 v8.71,22.93
IN_DRV  (via drill 0.3)
  Top 0.127: v12.33,13.92 11.95,13.54 11.95,13.16 IC3.16 | v20.08,11.38 20.46,11.76 21.09,11.76 21.73,12.4 21.73,13.58 22.07,13.92 22.87,13.92 23.38,14.43 23.38,15.7 20.94,18.15 20.94,19.61 24.4,23.07 25.41,23.07 25.79,23.45 25.79,23.57 25.92,23.7 26.68,23.7 IC4.4
  Bottom 0.127: v12.33,13.92 12.33,12.65 11.82,12.14 11.82,10.75 12.08,10.49 19.19,10.49 v20.08,11.38
LEDA  (via drill 0.3)
  Top 0.127: v31.1,22.41 31.1,21.91 R7.2 | v32.26,21.66 v32.27,21.65 v32.27,20.32
  Bottom 0.127: v31.1,22.41 31.14,22.37 31.65,22.37 32.08,21.94 32.08,21.84 v32.26,21.66 | U$1.3 32.6,20.36 32.56,20.32 v32.27,20.32
LEDK  (via drill 0.3)
  Top 0.127: Q2.3 30.82,19.18 v30.82,19.05
  Bottom 0.127: v30.82,19.05 30.89,18.98 31.18,18.98 31.53,19.33 31.53,20.19 31.99,20.65 31.99,20.93 32.12,21.06 U$1.2
MISO  (via drill 0.3)
  Top 0.127: v1.83,17.05 D6.1 | D6.1 | D6.1 | D6.1 | R11.2 5.81,16.64 4.88,17.58 v4.88,17.76 4.88,18.05 5.76,18.94 6.72,18.94 v6.96,18.7 | v26.3,15.57 26.3,15.7 25.79,16.21 25.54,16.21 25.29,15.95 24.9,15.95 IC3.33 | v23.38,20.08 22.59,20.08 22.5,19.98 22.5,19.45 24.08,17.87 v24.08,16.53 | v24.66,5.58 24.66,5.42 24.02,4.78 v21.48,4.78
  Bottom 0.127: 3.27,16.62 3.82,16.07 3.82,14.94 3.44,14.56 3.44,9.22 10.68,1.98 18.43,1.98 21.22,4.78 v21.48,4.78 | 3.27,16.62 3.21,16.68 3.21,16.77 2.79,17.2 1.98,17.2 v1.83,17.05 1.79,17.1 1.16,17.1 0.9,17.35 0.9,17.86 1.79,18.75 1.79,24.97 4.33,27.51 19.44,27.51 22.87,24.08 22.87,23.7 22.75,23.57 22.75,20.63 23.3,20.08 v23.38,20.08 | v26.3,15.57 26.3,16.08 28.56,18.34 28.56,18.65 28.21,19 26.3,19 24.08,16.78 v24.08,16.53 | v24.66,5.58 23.97,5.58 22.87,6.68 22.87,7.08 J3.P7 | v4.88,17.76 4.54,17.42 4.54,17.12 4.05,16.62 3.27,16.62 | IC2.2 7.06,18.02 7.3,18.26 7.3,18.36 v6.96,18.7
MOSI  (via drill 0.3)
  Top 0.127: D5.1 7.31,8.85 7.31,8.29 7.47,8.13 7.91,8.13 8.13,8.35 8.65,8.35 v9.4,9.1 | v25.7,15.11 25.7,14.95 25.3,14.56 25.29,14.56 24.9,14.18 IC3.31 | v34.81,15.83 34.05,15.83 33.67,16.21 33.67,16.59 33.03,17.22 33.03,18.24 R10.2 | v18.92,9.34 19.93,9.34 v20,9.41 | v23.41,13.78 23.41,14.08 23.72,14.39 23.72,15.91 v23.76,15.95 21.2,18.51 21.2,19.47 22.51,20.78 v23.25,20.78
  Bottom 0.127: J3.P3 18.39,7.89 18.19,8.1 17.93,8.36 | 17.93,8.36 16.68,9.6 10.99,9.6 9.65,8.25 | 9.65,8.25 9.63,8.24 IC2.5 | IC2.5 | v9.4,9.1 9.65,8.85 9.65,8.25 | v25.7,15.11 25.62,15.03 24,15.03 23.72,15.3 23.72,15.91 v23.76,15.95 | v23.25,20.78 23.25,23.45 28.21,28.4 30.91,28.4 34.14,25.17 34.14,22.47 35.33,21.28 35.33,20.12 35.58,19.86 35.58,19.42 35.63,19.37 35.63,19.25 35.11,18.73 35.11,18.51 35.16,18.46 35.51,18.46 35.66,18.3 35.66,17.08 34.61,16.03 34.68,15.95 | 34.68,15.95 34.3,15.57 33.67,15.57 U$1.10 | 34.68,15.95 v34.81,15.83 | v18.92,9.34 17.93,8.36 | v20,9.41 20,10.03 23.41,13.44 v23.41,13.78
N$1
  Top 0.127: R2-USB.1 27.36,3.88 21.78,3.88 20.15,5.51 20.15,5.73 19.76,6.12 J1.B5
N$2  (via drill 0.3)
  Top 0.127: SJ1.1 6.78,15.4 6.78,15.67 6.6,15.85 5.05,15.85 4.85,16.06 4.85,17.14 4.08,17.91 v3.25,17.91 | v1.49,17.72 1.01,17.23 1.01,14.51 R6-ESP1.1
  Bottom 0.127: v3.25,17.91 3.06,17.72 v1.49,17.72
N$3  (via drill 0.3)
  Top 0.127: 31.78,12.16 32.98,10.96 C1+BAT1.1 32.52,10.37 29.77,10.37 D2.1 | 31.78,12.16 31.76,12.18 T1.2 | 28.59,17.1 27.83,16.34 27.32,16.34 IC1.3 | 28.59,17.1 28.59,17.35 27.83,18.11 27.32,18.11 IC1.1 | 28.59,17.1 30.55,17.1 v30.76,16.89 | 31.78,12.16 v32.27,12.65
  Bottom 0.127: v30.76,16.89 30.76,15.94 32.14,14.56 32.14,12.78 v32.27,12.65
N$4
  Top 0.127: IC4.1 26.17,25.32 25.82,25.67 24.4,25.67 24.29,25.78 24.29,26.34 24.44,26.48 25.35,26.48 26.17,27.3 28.41,27.3 28.58,27.13 28.58,26.42 29.25,25.75 29.96,25.75 30.03,25.68 33.42,25.68 34.35,24.75 34.35,24.21 34.68,23.88 34.68,22.83 35.14,22.37 35.14,22.27 35.12,22.25 35.12,21.52 35.16,21.48 35.16,18.62 34.47,17.93 C1.2
N$7  (via drill 0.3)
  Top 0.127: R6.2 26.39,21.7 Q2.1 27.56,21.26 v28.03,20.79 | R5.1 v23.17,11.33 v23.18,11.33
  Bottom 0.127: v28.03,20.79 29.25,19.57 29.25,18.8 28.83,18.38 28.83,17.07 27.32,15.56 27.32,13.73 24.92,11.33 v23.18,11.33
N$8
  Top 0.127: R6-ESP1.2 2.21,12.35 2.21,12.73 2.98,13.5 R7-ESP1.1 | R6-ESP1.2 | R6-ESP1.2 2.25,12.31 2.25,11.56 2.56,11.25 3.25,11.25 4.08,12.08 5.29,12.08 5.66,12.45 SJ2.2
N$10  (via drill 0.3)
  Top 0.127: R1_BAT.2 25.8,7.27 v25.82,7.29 | v27.06,10.86 27.43,11.23 27.47,11.23 27.76,11.52 U1.1
  Bottom 0.127: v27.06,10.86 27.06,10.56 25.87,9.37 25.87,7.34 v25.82,7.29
N$12
  Top 0.127: R2_BAT.2 30.42,9.4 30.3,9.52 30.13,9.52 29.29,8.68 28.3,8.68 U1.5
N$13
  Top 0.127: J1.A5 16.76,6.12 17.54,5.34 18.83,5.34 19.28,5.78 19.66,5.78 19.89,5.55 19.89,5.2 19.31,4.62 10.5,4.62 R1-USB.2
N$16
  Top 0.127: LED1.C 26.97,6.11 25.8,4.94 R1_BAT.1
PIN_LED
  Top 0.127: IC3.30 23.89,13.03 23.89,12.02 R5.2
PPG_INT  (via drill 0.3)
  Top 0.127: IC3.36 24.16,18.41 v22.92,19.65
  Bottom 0.127: TP8.TP 26.54,22.9 26.02,23.42 25.47,23.42 24.5,22.45 24.5,21.23 24.58,21.15 24.58,20.5 23.73,19.65 v22.92,19.65
RESET  (via drill 0.3)
  Top 0.127: 26.62,26.56 29.81,23.37 v29.81,22.17 29.77,22.22 24.42,22.22 23.71,21.51 23.71,20.78 24.27,20.23 24.06,20.02 24.06,19.1 24.29,18.87 25.46,18.87 25.73,18.6 v25.73,17.44 | IC3.45 26.12,26.06 26.62,26.56 | 26.62,26.56 R1-ESP.1 | RESSET_BUTTON.P$4 27.84,5.77 RESSET_BUTTON.P$3 | RESSET_BUTTON.P$4 | RESSET_BUTTON.P$3 | C11.1 26.66,12.82 26.33,12.49 26.33,10.83 v26.48,10.68 25.7,10.68 25.05,11.33 25.05,12.36 24.89,12.52 24.4,12.52 24.23,12.69 24.23,15.42 v24.17,15.48 | v27.74,7.3 RESSET_BUTTON.P$3
  Bottom 0.127: v29.81,22.17 TP12.TP | v26.48,10.68 26.48,10.97 26.79,11.28 28.18,11.28 28.32,11.14 28.32,10.84 28.04,10.56 28.04,10.2 28.13,10.11 28.13,9.91 27.93,9.71 27.93,8.66 28.66,7.93 28.66,7.6 28.36,7.3 v27.74,7.3 | v24.17,15.48 24.17,15.88 v25.73,17.44
RX  (via drill 0.3)
  Top 0.127: IC3.40 25.08,21.81 25.57,21.32 25.57,19.34 25.66,19.25 26.16,19.25 26.29,19.12 26.29,16.21 26.74,15.76 29.09,15.76 v29.23,15.91
  Bottom 0.127: TP10.TP 29.23,15.11 v29.23,15.91
SCK  (via drill 0.3)
  Top 0.127: v8.36,8.81 8.36,10.23 D4.1 | R9.2 3.87,15.56 v3.87,14.29 | v25.67,15.7 25.41,15.45 25.29,15.45 24.9,15.07 IC3.32 | v28.08,18.49 28.08,18.24 28.76,17.56 v30.71,17.56
  Bottom 0.127: IC2.6 | IC2.6 8.58,8.21 8.58,8.59 v8.36,8.81 4.49,8.81 3.87,9.43 v3.87,14.29 | IC2.6 8.36,7.73 11.47,4.62 19.31,4.62 20.19,5.5 20.19,6.27 20.59,6.68 J3.P5 20.59,7.19 21.48,8.08 24.29,8.08 25.56,6.81 28.59,6.81 32.78,11 32.78,12.78 32.4,13.16 32.4,16.21 | v25.67,15.7 25.67,16.08 v28.08,18.49 | v30.71,17.56 32.06,16.21 32.4,16.21 | 32.4,16.21 U$1.9 | IC2.6 8.39,7.95 IC2.6
SCL  (via drill 0.3)
  Top 0.127: IC3.13 12.05,15.86 v12.12,15.93 | IC5.8 7.14,19.19 v7.43,19.19 | IC4.2 v25.67,24.82
  Bottom 0.127: v7.43,19.19 7.43,19.17 TP6.TP 8.65,17.99 9.28,17.99 11.44,15.83 11.99,15.83 v12.12,15.93 12.27,16.08 17.61,16.08 18.44,16.91 18.44,17.63 19.36,18.55 25.06,18.55 31.09,24.58 31.09,26.74 30.06,27.78 28.63,27.78 v25.67,24.82
SDA  (via drill 0.3)
  Top 0.127: IC5.9 v4.96,19.93 | IC3.12 10.91,16.74 v11.68,16.74 13.71,18.77 v13.71,19.52 | v22.38,23.86 24.16,23.86 24.25,23.95 25.34,23.95 25.71,24.32 IC4.3
  Bottom 0.127: TP7.TP 4.96,23.15 v4.96,19.93 5.31,20.28 5.49,20.28 5.52,20.25 8.53,20.25 8.79,20.51 9.58,20.51 9.95,20.14 9.95,19.13 11.68,17.4 v11.68,16.74 | v13.71,19.52 15.18,20.99 22.26,20.99 22.38,21.11 v22.38,23.86
SS_FLASH  (via drill 0.3)
  Top 0.127: v13.65,14 13.65,13.13 IC3.18
  Bottom 0.127: IC2.1 6.78,14.79 12.86,14.79 v13.65,14
SS_SD  (via drill 0.3)
  Top 0.127: v6.3,18.49 6.04,18.23 R8.2 | v5.09,10.48 D3.1 | IC3.7 v11.69,20.96
  Bottom 0.127: v11.69,20.96 11.29,20.56 11.29,19.61 11.32,19.61 12.25,18.68 12.25,18.12 12.5,17.87 12.5,16.63 12.3,16.55 11.54,16.22 10.14,17.62 10.14,18.22 8.73,19.63 7.11,19.63 6.3,18.82 v6.3,18.49 5.09,17.28 5.09,14.87 4.19,13.97 4.19,11.38 v5.09,10.48 5.09,10.33 5.87,9.55 8.21,9.55 9.21,8.55 9.21,7.44 9.33,7.32 10.15,7.32 12.17,9.34 15.83,9.34 17.29,7.88 J3.P2
SS_TFT  (via drill 0.3)
  Top 0.127: IC3.21 15.76,13.53 15.76,13.84 15.61,13.99 14.57,13.99 14.37,14.19 14.37,14.96 14.69,15.28 19.11,15.28 20.09,14.3 20.09,14.03 20.33,13.79 v20.85,13.79 | v21.95,14.34 22.22,14.61 v22.22,16.07 | v28.71,19.31 29.13,18.89 v30.22,18.89
  Bottom 0.127: v20.85,13.79 20.85,13.98 21.21,14.34 v21.95,14.34 | v22.22,16.07 22.22,16.1 21.57,16.75 21.57,17.71 21.83,17.97 21.83,18.19 21.94,18.29 25.22,18.29 26.38,19.46 28.56,19.46 v28.71,19.31 | v30.22,18.89 31.33,17.78 31.33,17.3 31.74,16.89 U$1.8
TFT_DC  (via drill 0.3)
  Top 0.127: IC3.22 16.62,13.52 16.62,13.71 16.45,13.88 16.12,13.88 15.63,14.37 14.96,14.37 14.74,14.59 14.74,14.72 15.03,15.01 19.01,15.01 19.7,14.32 v19.7,13.88 | v20,12.34 20,11.99 v19.44,11.43 | v18.28,10.95 18.28,9.14 18.6,8.82 v20.01,8.82 | v27.83,15.35 27.93,15.44 30.42,15.44 31.08,16.1 31.08,16.57 31.77,17.26 v31.77,17.48
  Bottom 0.127: v19.7,13.88 19.7,12.64 v20,12.34 | v19.44,11.43 18.96,10.95 v18.28,10.95 | v20.01,8.82 20.23,8.82 21.14,9.73 24.21,9.73 27.74,13.25 27.74,13.98 27.58,14.14 27.58,15.09 v27.83,15.35 | v31.77,17.48 31.87,17.58 U$1.7
TX  (via drill 0.3)
  Top 0.127: IC3.39 v24.13,20.96
  Bottom 0.127: v24.13,20.96 24.13,23.87 28.29,28.03 30.16,28.03 31.35,26.85 31.35,24.24 30.61,23.51 30.61,22.1 31.16,21.55 31.16,20.12 30.56,19.52 29.94,19.52 29.78,19.36 29.78,16.15 30.17,15.76 30.52,15.76 31.16,15.12 31.16,14.44 31.85,13.75 31.85,10.9 30.12,9.17 TP9.TP
VBAT  (via drill 0.3)
  Top 0.3: C2_BAT.1 31.46,14.56 31.18,14.28 T1.3 29.67,13.77 26.25,13.77 26.14,13.67 | 26.14,13.67 25.86,13.39 U1.3 | v26.42,14.63 26.14,14.35 26.14,13.67 | v4.64,13.47 v4.65,13.47 SJ1.2
  Bottom 0.3: v4.64,13.47 5.23,14.06 8.52,14.06 8.9,14.44 12.54,14.44 13.13,13.85 13.13,13.11 13.42,12.82 16.16,12.82 17.42,14.08 17.42,14.3 18.34,15.22 TP5.TP 19.2,15.02 19.7,15.02 20.19,15.51 21.49,15.51 22.77,15.51 23.7,14.58 26.36,14.58 v26.42,14.63
VBUS
  Top 0.127: LED1.A 26.94,8.33 26.94,9.48 D2.2
  Top 0.3: C4_USB.1 12.24,9.13 D1.2 13.03,9.36 13.7,10.03 13.7,10.94 14.52,11.75 18.39,11.75 20.46,9.68 PFMF.050.1.2 | PFMF.050.1.2 22.57,8.41 C5_USB.1 | PFMF.050.1.2 22.08,10.46 C1_BAT.1 24.07,9.22 U1.4 26.15,9.51 D2.2 27.22,9.92 27.22,10.21 27.9,10.89 28.23,10.89 28.39,11.05 28.39,11.78 28.79,12.18 T1.1 29.96,12.18 30.34,11.8 30.34,11.29 R1_PWRUSB.2
VIBE_OUT+  (via drill 0.3)
  Top 0.127: IC4.9 29.34,24.82 v29.29,24.77
  Bottom 0.127: v29.29,24.77 27.91,24.77 TP1.TP
VIBE_OUT-  (via drill 0.3)
  Top 0.127: IC4.7 30.45,23.82 30.23,23.6 30.23,22.96 30.33,22.86 31.57,22.86 v31.63,22.8
  Bottom 0.127: v31.63,22.8 32.54,23.71 TP2.TP
VUSB
  Top 0.3: PFMF.050.1.1 16.85,9.57 16.85,9.49 | 16.85,9.49 18.07,8.28 19.79,8.28 20.26,7.81 J1.B4 J1.A9 | 16.85,9.49 16.85,8.56 16.78,8.56 15.87,7.65 15.87,7.61 15.85,7.6 15.76,7.51 J1.B9 J1.A4